# Altium PCB Bicimaps_3.PcbDoc
Units mil, origin at the board's own origin, x right, y up, seen from the top; angles counter-clockwise.
Board outline 2170 x 1455 mil, 2 copper layers (Top Layer, Bottom Layer); 43 components, 44 nets, 222 pads, 62 vias.
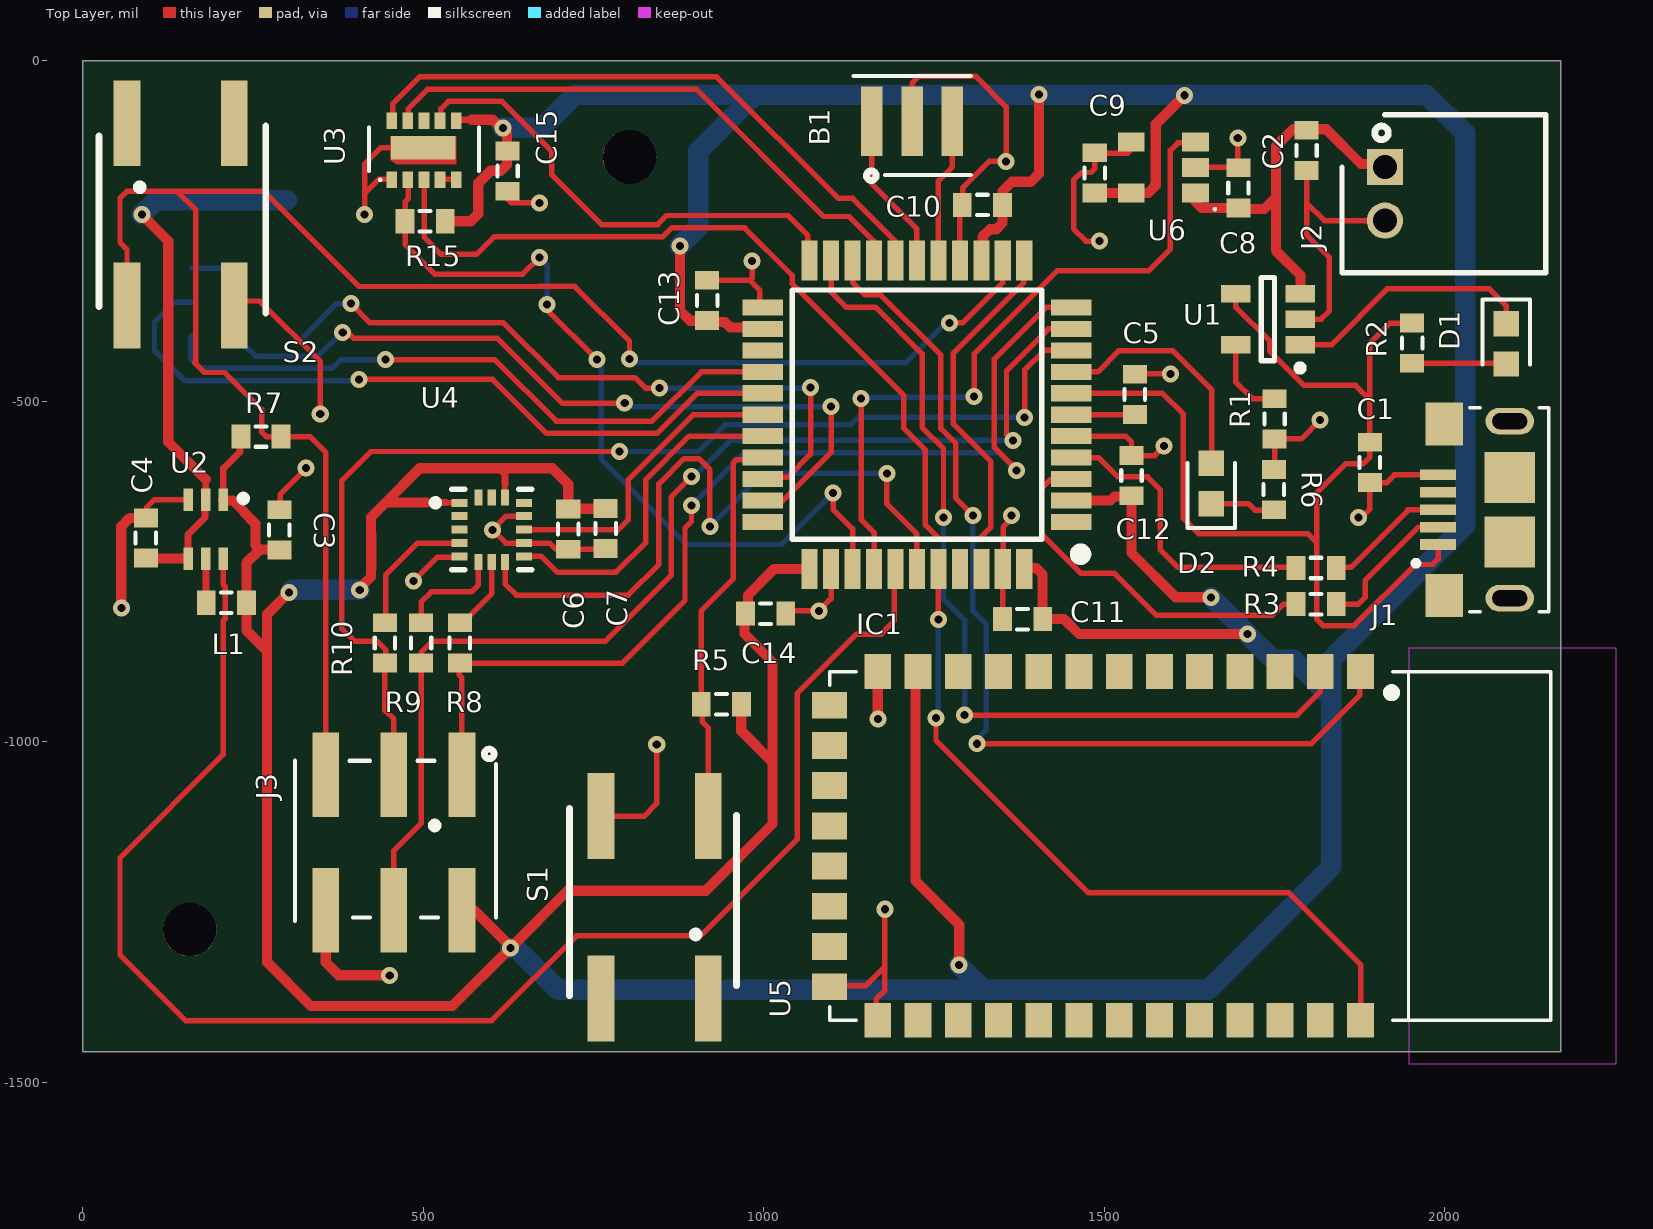
[diagram p0: Top Layer view]
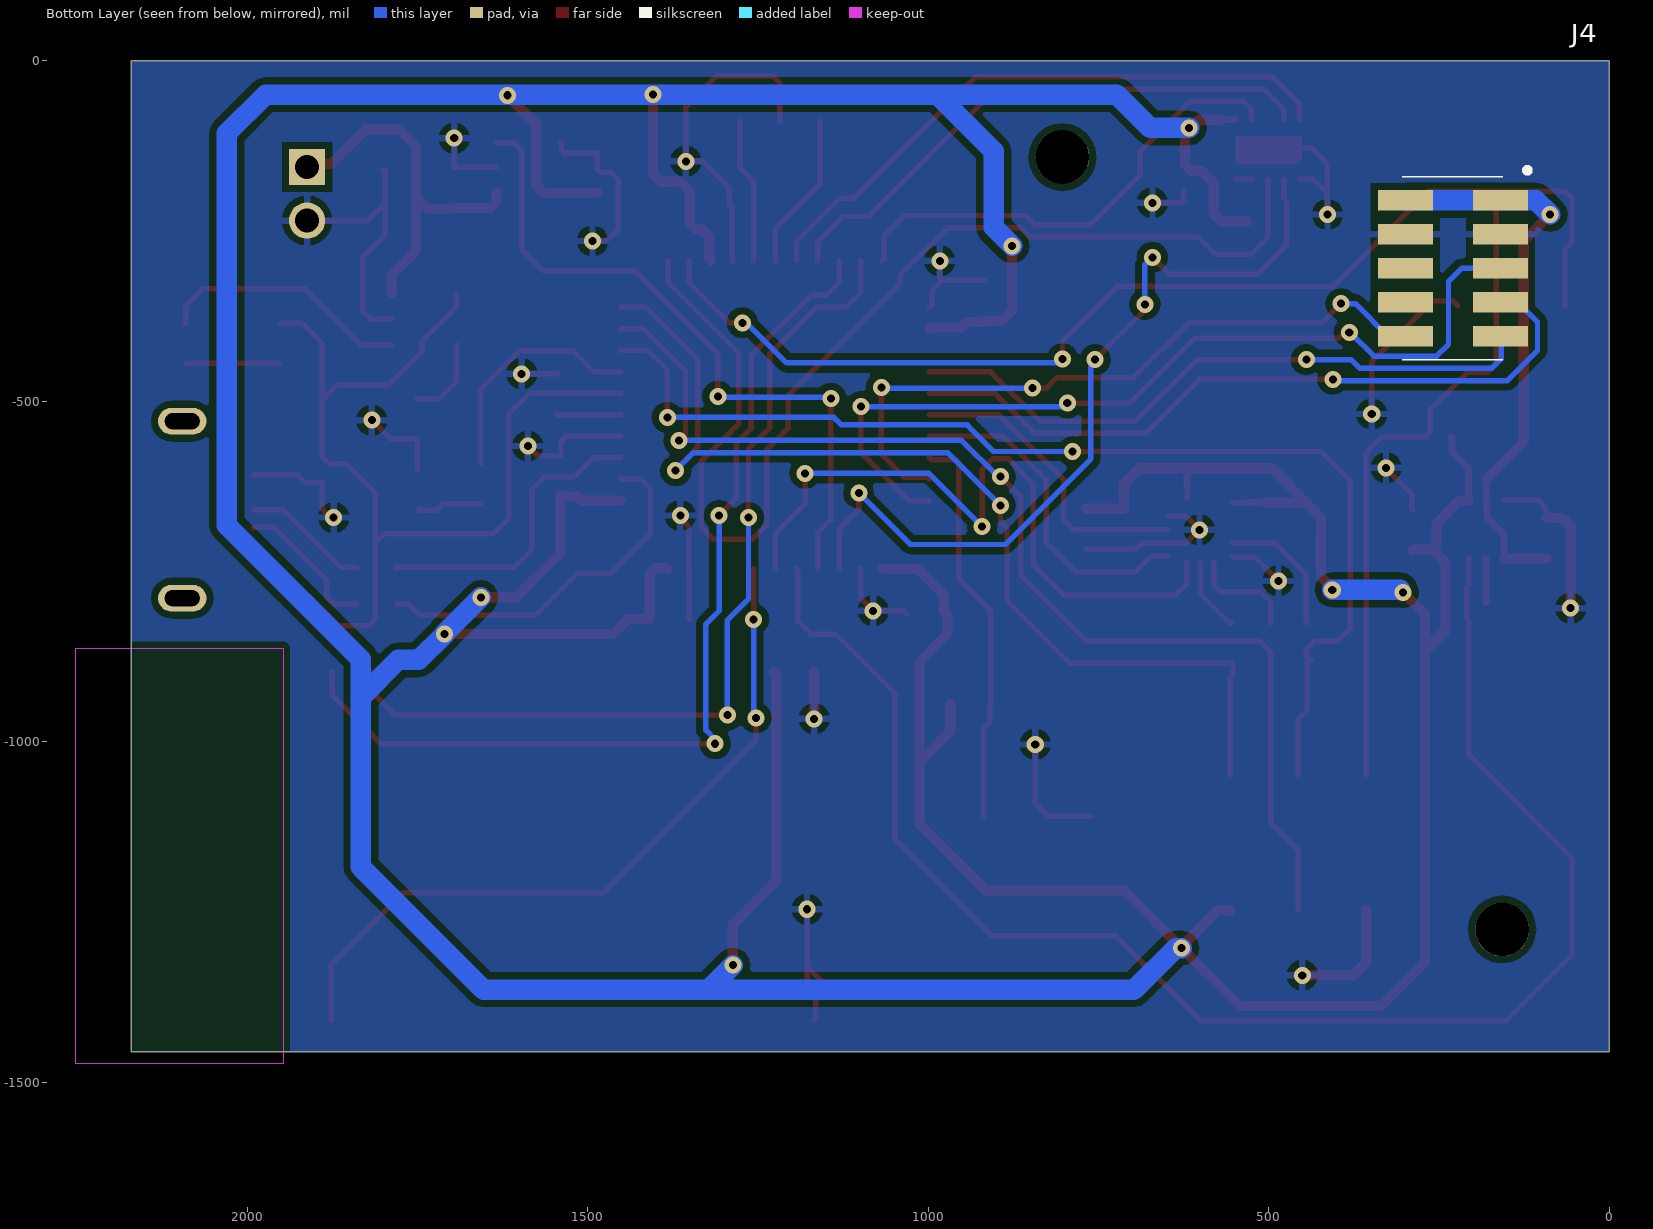
[diagram p1: Bottom Layer view, seen from below]

## Layer stack, top to bottom
Top Solder: solder mask 0.4, Solder Resist, Dk 3.5
Top Layer: signal copper 1.4
Dielectric 1: dielectric 12.6, FR-4, Dk 4.8
Bottom Layer: signal copper 1.4
Bottom Solder: solder mask 0.4, Solder Resist, Dk 3.5

## Board outline
0,-1455 2170,-1455 2170,0 0,0

## Design rules (kind name [scope] priority, off if disabled: settings)
Clearance [All] p1: gap=0 ignorepadtopadclearanceinfootprint=TRUE
MinimumSolderMaskSliver [All] p1: minsoldermaskwidth=1
PolygonConnect [All] p1: connectstyle=Relief reliefconductorwidth=10 reliefentries=4 polygonreliefangle="90 Angle" airgapwidth=10
RoutingVias [All] p1: holewidth=28 width=50 viastyle="Through Hole" minholewidth=28 minwidth=50 maxholewidth=28 maxwidth=50
ShortCircuit [All] p1: allowed=TRUE
SilkToSolderMaskClearance [IsPad] p1: minsilkscreentomaskgap=4 clearancetoexposedcopper=TRUE
SolderMaskExpansion [All] p1: expansion=4
Width [All] p1: maxlimit=30 minlimit=8 preferedwidth=10 toplayer_maxwidth=15 minimp=50.000000 maximp=50.000000 favimp=50.000000
27 further rules are at their usual default settings.

## Classes and differential pairs
component class Sensores_3: C6 C7 C15 J4 q R15 U3 U4 U5
component class Procesador_3: B1 C5 C10 C11 C12 C13 C14 D2 IC1 J3 R5 R6 R7 R8 R9 R10 S1 S2
component class Alimentacion_3: C1 C2 C3 C4 C8 C9 D1 J1 J2 L1 R1 R2 R3 R4 U1 U2 U6

## Components (designator, comment, footprint, x,y, rotation, side; value= is the part's Value field where it differs from the comment)
B1 "CSTCR6" CSTCR6M00G53 1218,-89 r180 top
C1 "Cap" 0603 1890,-590 r90 top value=4.7uF
C2 "Cap" 0603 1797,-132 r90 top value=4.7uF
C3 "Cap" 0603 289,-689 r270 top value=10uF
C4 "Cap" 0603 93,-701 r270 top value=10uF
C5 "Cap" 0603 1545,-490 r90 top value=1uF
C6 "Cap" 0603 713,-688 r90 top value=0.1uF
C7 "Cap" 0603 768,-687 r90 top value=10uF
C8 "Cap" 0603 1697,-187 r270 top value=1uF
C9 "Cap" 0603 1486,-165 r270 top value=1uF
C10 "Cap" 0603 1321,-212 r0 top value=0.1uF
C11 "Cap" 0603 1380,-820 r0 top value=0.1uF
C12 "Cap" 0603 1540,-609.53 r270 top value=0.1uF
C13 "Cap" 0603 917,-352 r270 top value=0.1uF
C14 "Cap" 0603 1003,-812 r180 top value=0.1uF
C15 "Cap" 0603 624,-162.53 r90 top value=1uF
D1 "150060GS75000" LEDC1608X80N 2090,-416 r270 top
D2 "150060GS75000" LEDC1608X80N 1657,-621 r90 top
IC1 "ATMEGA16U4-AU" "ATMEGA 16U4" 1225,-520 r180 top
J1 "10118193-0001LF" FCI_10118193-0001LF_10118193-0001LF(Primary) 2095.32,-659.41 r90 top
J2 "S2B-PH-K-S(LF)(SN)" S2B_Lipo_Header 1912,-156.26 r270 top
J3 "ISP_6pin" ISP_6PIN 457,-1148 r180 top
J4 "AMPHENOL SM-UART-04L" "PM SENSOR" 1.54,-0.28 r180 bottom
L1 "Inductor" 0603 211,-796 r0 top value=4.7uH
R1 "Res3" 0603 1750,-526 r90 top value=10K
R2 "Res3" 0603 1952,-415 r90 top value=1K
R3 "Res3" 0603 1811,-798 r0 top value=22
R4 "Res3" 0603 1811,-745 r0 top value=22
R5 "Res3" 0603 938,-945 r0 top value=10K
R6 "Res3" 0603 1749,-630 r270 top value=1K
R7 "Res3" 0603 262,-552 r180 top value=10K
R8 "Res3" 0603 554,-855 r90 top value=1K
R9 "Res3" 0603 497,-855 r90 top value=1K
R10 "Res3" 0603 444,-855 r270 top value=1K
R15 "Res3" 0603 503,-236 r0 top value=4.7K
S1 "EVQ-Q2P03W" EVQ-Q2P03W 840,-1243 r90 top value=Value
S2 "EVQ-Q2P03W" EVQ-Q2P03W 144,-226 r270 top value=Value
U1 "MCP73831T-2ACI/OT" SOT-23-OT5_N 1740.17,-379.57 r180 top
U2 "TPS61222" TPS61222DCK 181,-688 r0 top
U3 "CCS811" CCS811 454,-177 r90 top
U4 "LIS3DHTR" LIS3DHTR 529.89,-617.82 r0 top value=Value
U5 "MODULE-BLUETOOTH-HC-05(34P-27X13MM)" HC-05 1096.69,-1153.09 r270 top
U6 "NCP114" NCP114-TSOP5 1634,-119.6 r270 top

## Footprints (in the part's own frame and the unit in brackets; to place one, negate y for a bottom-side part, rotate by r counter-clockwise, add the part's x,y. Pads: shape width x height; smd on the part's side, far side on the other; paste and mask are expansions set on the pad)
0603 [mm]
  rect 0.7x0.9 smd: 1(-0.75,0) 2(0.75,0)
  silkscreen extent -0.2,-0.38 0.2,0.38, body extent -0.85,-0.48 0.85,0.48, height 0.9
"ATMEGA 16U4" [mm]
  rect 1.5x0.6 smd: 1(-5.75,4) 2(-5.75,3.2) 3(-5.75,2.4) 4(-5.75,1.6) 5(-5.75,0.8) 6(-5.75,0) 7(-5.75,-0.8) 8(-5.75,-1.6) 9(-5.75,-2.4) 10(-5.75,-3.2) 11(-5.75,-4) 23(5.75,-4) 24(5.75,-3.2) 25(5.75,-2.4) 26(5.75,-1.6) 27(5.75,-0.8) 28(5.75,0) 29(5.75,0.8) 30(5.75,1.6) 31(5.75,2.4) 32(5.75,3.2) 33(5.75,4)
  rect 0.6x1.5 smd: 12(-4,-5.75) 13(-3.2,-5.75) 14(-2.4,-5.75) 15(-1.6,-5.75) 16(-0.8,-5.75) 17(0,-5.75) 18(0.8,-5.75) 19(1.6,-5.75) 20(2.4,-5.75) 21(3.2,-5.75) 22(4,-5.75) 34(4,5.75) 35(3.2,5.75) 36(2.4,5.75) 37(1.6,5.75) 38(0.8,5.75) 39(0,5.75) 40(-0.8,5.75) 41(-1.6,5.75) 42(-2.4,5.75) 43(-3.2,5.75) 44(-4,5.75)
  silkscreen extent -6.3,-4.65 4.65,5.4, body extent -6,-6 6,6, height 1.2
CCS811 [mm] "CCS811 IAQ measurer"
  rect 0.6x0.4 smd mask+0.05: ADD(0.05,0) AUX(2.25,-1.2) INT(0.05,-1.2) PWM(0.05,-1.8) RES(0.05,-0.6) SCL(2.25,0) SDA(2.25,-0.6) SEN(0.05,-2.4) VDD(2.25,-2.4) WAK(2.25,-1.8)
  rect 0.88x2.413 smd paste+0 mask+0: GND(1.245,-1.168)
  Top Layer region: 0.8,0.05
  Top Layer region: 1.68,0.05 1.68,-2.4 0.62,-2.4 0.62,-0.17 0.8,0.05
  silkscreen extent 0.03,-3.25 2,0.85
CSTCR6M00G53 [mm]
  rect 0.8x2.6 smd: 1(1.5,0) 2(0,0) 3(-1.5,0)
  silkscreen extent -2.18,-1.68 2.18,2.21
EVQ-Q2P03W [mm]
  rect 3.2x1 smd: 1(-3.4,-2) 2(3.4,-2) 3(-3.4,2) 4(3.4,2)
  silkscreen extent -3.3,-3.05 3.68,3.18
FCI_10118193-0001LF_10118193-0001LF(Primary) [mm]
  rect 0.4x1.35 smd: 1(-1.3,2.675) 2(-0.65,2.675) 3(0,2.675) 4(0.65,2.675) 5(1.3,2.675)
  rect 1.6x1.4 smd: S1(-3.2,2.45) S2(3.2,2.45)
  rect 1.9x1.9 smd: S3(1.2,0) S4(-1.2,0)
  oval 1x1.8 hole 0.6 slot 1.3 at 90 deg: S5(-3.3,0) S6(3.3,0)
  silkscreen extent -3.8,-1.45 3.8,3.6
HC-05 [mm]
  rect 1.3x1 smd: 1(-6.5,19.8) 2(-6.5,18.3) 3(-6.5,16.8) 4(-6.5,15.3) 5(-6.5,13.8) 6(-6.5,12.3) 7(-6.5,10.8) 8(-6.5,9.3) 9(-6.5,7.8) 10(-6.5,6.3) 11(-6.5,4.8) 12(-6.5,3.3) 13(-6.5,1.8) 22(6.5,1.8) 23(6.5,3.3) 24(6.5,4.8) 25(6.5,6.3) 26(6.5,7.8) 27(6.5,9.3) 28(6.5,10.8) 29(6.5,12.3) 30(6.5,13.8) 31(6.5,15.3) 32(6.5,16.8) 33(6.5,18.3) 34(6.5,19.8)
  rect 1x1.3 smd: 14(-5.25,0) 15(-3.75,0) 16(-2.25,0) 17(-0.75,0) 18(0.75,0) 19(2.25,0) 20(3.75,0) 21(5.25,0)
  Top Layer region: 12.065,26.289
  Top Layer keep-out region: -8.636,29.083
  Keep-Out Layer region: -7.366,21.59 8.128,21.59 8.128,29.337 -7.366,29.337
  silkscreen extent -6.5,0 6.5,26.9
ISP_6PIN [mm]
  rect 1x3.15 smd: 1(-2.54,-2.525) 2(-2.54,2.525) 3(0,-2.525) 4(0,2.525) 5(2.54,-2.525) 6(2.54,2.525)
  silkscreen extent -3.81,-3.48 3.68,2.92
LEDC1608X80N [mm]
  rrect0% 0.95x0.95 smd: 1(-0.75,0) 2(0.75,0)
  silkscreen extent -1.65,-0.89 0.76,0.89
LIS3DHTR [mm]
  rect 0.6x0.3 smd: 1(0.6,-0.8) 2(0.6,-1.3) 3(0.6,-1.8) 4(0.6,-2.3) 5(0.6,-2.8) 9(3,-2.8) 10(3,-2.3) 11(3,-1.8) 12(3,-1.3) 13(3,-0.8)
  rect 0.3x0.6 smd: 6(1.3,-3) 7(1.8,-3) 8(2.3,-3) 14(2.3,-0.6) 15(1.8,-0.6) 16(1.3,-0.6)
  silkscreen extent -0.42,-3.3 3.3,-0.3
NCP114-TSOP5 [mm]
  rect 0.7x1 smd: 1(1.9,0) 2(0.95,0) 3(0,0) 4(0,-2.4) 5(1.9,-2.4)
  silkscreen extent 2.48,0.71 2.52,0.74
"PM SENSOR" [mm]
  rect 2.05x0.76 smd: 1(-4.025,-5.2) 2(-7.575,-5.2) 2(-7.575,-5.2) 3(-4.025,-6.47) 4(-7.575,-6.47) 5(-4.025,-7.74) 6(-7.575,-7.74) 7(-4.025,-9.01) 8(-7.575,-9.01) 9(-4.025,-10.28) 10(-7.575,-10.28)
  silkscreen extent -7.7,-11.15 -2.92,-3.99
S2B_Lipo_Header [mm]
  rect 1.35x1.35 / inner round 1.35 / far side rect 1.35x1.35 hole 0.9: 1(0,0)
  round 1.35 hole 0.9: 2(2,0)
  silkscreen extent -1.95,-1.6 3.95,6
SOT-23-OT5_N [mm] "SOT23, 5-Leads, Body 2.9x1.6mm, Pitch 0.95mm, Lead Span 2.7mm, IPC Medium Density"
  rect 1.1x0.65 smd: 1(-1.2,0.95) 2(-1.2,0) 3(-1.2,-0.95) 4(1.2,-0.95) 5(1.2,0.95)
  silkscreen extent -1.33,-1.55 0.25,1.95, body extent -0.9,-1.55 0.9,1.55, height 1.45
TPS61222DCK [mm]
  rect 0.35x0.85 smd: EN(0.65,-1.1) FB(0,1.1) GND(-0.65,1.1) L(0,-1.1) VIN(0.65,1.1) VOUT(-0.65,-1.1)
  silkscreen extent 1.27,1.02 1.52,1.27

## Part data
B1: library part CSTCE16M0V53C-R0, "SMD Ceramic Resonator 16 MHz 15PF CSTCE16M0V53C-R0, Ceramic Resonator, 16MHz Expander 15pF, 4-Pin, 3.2 x 1.3 x 0.9mm", Manufacturer_Name="Murata Electronics", Mouser Part Number=81-CSTCE16M0V53C-R0, Supplier Part Number 1=7926530, Datasheet Link=https://componentsearchengine.com/Datasheets/1/CSTCE16M0V53C-R0.pdf, Geometry.Height=1mm, Manufacturer_Part_Number=CSTCE16M0V53C-R0, Supplier 1=RSComponents, Supplier 2=Digi-Key, Supplier Part Number 2=490-1204-1-ND
C1 C2: library part Cap_0603, "Capacitor", Supplier Part Number 1=6911155, LatestRevisionDate=17-Jul-2002, LatestRevisionNote="Re-released for DXP Platform.", PackageDescription="Radial Cap, Thru-Hole; 2 Leads; 0.3 in Pin Spacing", PackageReference=RAD-0.3, Published=8-Jun-2000, Publisher="Altium Limited", Supplier 1=RSComponents, Supplier 2=Digi-Key, Supplier Part Number 2=399-5503-6-ND
C3 C4 C7: library part Cap_0603, "Capacitor", Supplier Part Number 1=7882893, LatestRevisionDate=17-Jul-2002, LatestRevisionNote="Re-released for DXP Platform.", PackageDescription="Radial Cap, Thru-Hole; 2 Leads; 0.3 in Pin Spacing", PackageReference=RAD-0.3, Published=8-Jun-2000, Publisher="Altium Limited", Supplier 1=RSComponents, Supplier 2=Digi-Key, Supplier Part Number 2=445-7486-1-ND
C5 C8 C9 C15: library part Cap_0603, "Capacitor", Supplier Part Number 1=4612708, LatestRevisionDate=17-Jul-2002, LatestRevisionNote="Re-released for DXP Platform.", PackageDescription="Radial Cap, Thru-Hole; 2 Leads; 0.3 in Pin Spacing", PackageReference=RAD-0.3, Published=8-Jun-2000, Publisher="Altium Limited", Supplier 1=RSComponents, Supplier 2=Digi-Key, Supplier Part Number 2=478-1251-1-ND
C6 C11 C12 C13 C14: library part Cap_0603, "Capacitor", Supplier Part Number 1=8015205, LatestRevisionDate=17-Jul-2002, LatestRevisionNote="Re-released for DXP Platform.", PackageDescription="Radial Cap, Thru-Hole; 2 Leads; 0.3 in Pin Spacing", PackageReference=RAD-0.3, Published=8-Jun-2000, Publisher="Altium Limited", Supplier 1=RSComponents, Supplier 2=Digi-Key, Supplier Part Number 2=399-1095-1-ND
C10: library part Cap_0603, "Capacitor", Supplier Part Number 1=147538, LatestRevisionDate=17-Jul-2002, LatestRevisionNote="Re-released for DXP Platform.", PackageDescription="Radial Cap, Thru-Hole; 2 Leads; 0.3 in Pin Spacing", PackageReference=RAD-0.3, Published=8-Jun-2000, Publisher="Altium Limited", Supplier 1=RSComponents, Supplier 2=Digi-Key, Supplier Part Number 2=399-1281-1-ND
D1 D2: "Wurth Elektronik WL-SMCW 520 nm Green LED, 1608 (0603) Clear SMD package", Manufacturer_Name="Wurth Elektronik", RS Part Number=8154209P, Supplier Part Number 1=6973715, Arrow Part Number=150060GS75000, Arrow Price/Stock=http://uk.rs-online.com/web/p/products/8154209P, Datasheet Link=https://componentsearchengine.com/Datasheets/2/150060GS75000.pdf, Geometry.Height=0.8mm, Manufacturer_Part_Number=150060GS75000, RS Price/Stock=http://uk.rs-online.com/web/p/products/8154209P, Supplier 1=RSComponents, Supplier 2=Digi-Key, Supplier Part Number 2=732-4971-1-ND
IC1: "Integrated Circuit", Manufacturer_Name=Microchip, Supplier Part Number 1=1773649, Datasheet Link=http://www.atmel.com/images/atmel-7766-8-bit-avr-atmega16u4-32u4_summary.pdf, Height=1.2mm, Manufacturer_Part_Number=ATMEGA16U4-AU, Supplier 1=RSComponents, Supplier 2=Digi-Key, Supplier Part Number 2=ATMEGA16U4-AU-ND
J1: "Single Port 5 Contact Shielded SMT MICRO USB B-Type Receptacle", Package=None, Supplier Part Number 1=8632989, Availability=Unavailable, MF="Amphenol FCI", MP=10118193-0001LF, Price=None, SnapEDA_Link=https://www.snapeda.com/parts/10118193-0001LF/Amphenol%20FCI/view-part/?ref=snap, Supplier 1=RSComponents, Supplier 2=Digi-Key, Supplier Part Number 2=609-4616-1-ND
J2: "PH-2.0mm Header side entry 2 way JST PH Series, Series Number S2B, 2mm Pitch 2 Way 1 Row Right Angle PCB Header, Through Hole Termination, 2A", Manufacturer_Name="JST (JAPAN SOLDERLESS TERMINALS)", RS Part Number=1724889, Supplier Part Number 1=8201494, Arrow Part Number=S2B-PH-K-S(LF)(SN), Arrow Price/Stock=https://www.arrow.com/en/products/s2b-ph-k-s-lf-sn/jst-manufacturing, Datasheet Link=http://uk.rs-online.com/web/p/products/8201494, Geometry.Height=6mm, Manufacturer_Part_Number=S2B-PH-K-S(LF)(SN), RS Price/Stock=http://uk.rs-online.com/web/p/products/1724889, Supplier 1=RSComponents, Supplier 2=Digi-Key, Supplier Part Number 2=455-1719-ND
J3: Supplier Part Number 1=571-5-146130-2, Supplier 1=Mouser, Supplier 2=Digi-Key, Supplier Part Number 2=5-146130-2-ND
J4: library part AMPHENOL, Supplier Part Number 1=527-SM-UART-04L, Supplier 1=Mouser, Supplier 2=Digi-Key, Supplier 3=RSComponents, Supplier 4=Digi-Key, Supplier Part Number 2=235-1590-ND, Supplier Part Number 3=7679066, Supplier Part Number 4=SAM9874-ND
L1: Supplier Part Number 1=7754697, Code_IEC=1005, Code_JEITA=0402, LatestRevisionDate=29-May-2009, LatestRevisionNote="IPC-7351 Footprint Added.", PackageDescription="Chip Inductor", PackageReference=0402-A, Published=8-Jun-2000, Publisher="Altium Limited", Supplier 1=RSComponents, Supplier 2=Digi-Key, Supplier Part Number 2=445-3607-1-ND
R1 R5 R7: "Resistor", Supplier Part Number 1=1251173, LatestRevisionDate=29-May-2009, LatestRevisionNote="IPC-7351 Footprint Added.", PackageDescription="Chip Resistor", PackageReference=J1-0603, Published=8-Jun-2000, Publisher="Altium Limited", Supplier 1=RSComponents, Supplier 2=Digi-Key, Supplier Part Number 2=P10.0KHDKR-ND
R2 R6 R8 R9 R10: "Resistor", Supplier Part Number 1=8145889, LatestRevisionDate=29-May-2009, LatestRevisionNote="IPC-7351 Footprint Added.", PackageDescription="Chip Resistor", PackageReference=J1-0603, Published=8-Jun-2000, Publisher="Altium Limited", Supplier 1=RSComponents, Supplier 2=Digi-Key, Supplier Part Number 2=P1.00KHCT-ND
R3 R4: "Resistor", Supplier Part Number 1=7408928, LatestRevisionDate=29-May-2009, LatestRevisionNote="IPC-7351 Footprint Added.", PackageDescription="Chip Resistor", PackageReference=J1-0603, Published=8-Jun-2000, Publisher="Altium Limited", Supplier 1=RSComponents, Supplier 2=Digi-Key, Supplier Part Number 2=P22GCT-ND
R15: "Resistor", Supplier Part Number 1=8206865, LatestRevisionDate=29-May-2009, LatestRevisionNote="IPC-7351 Footprint Added.", PackageDescription="Chip Resistor", PackageReference=J1-0603, Published=8-Jun-2000, Publisher="Altium Limited", Supplier 1=RSComponents, Supplier 2=Digi-Key, Supplier Part Number 2=P4.70KHCT-ND
S1 S2: "Tactile 3.1 heigth", Manufacturer_Part_Number=EVQP2602W, Supplier Part Number 1=7561858, Built_By=EMA_UL_Team, C="Copyright (C) 2015 Accelerated Designs. All rights reserved", RefDes=RefDes, Supplier 1=RSComponents, Supplier 2=Digi-Key, Supplier Part Number 2=P12949SCT-ND, Type=DEV, Vendor=Panasonic
U1: "Miniature Single-Cell, Fully Integrated Li-Ion, Li-Polymer Charge Management Controller, 4.2V, 5-Pin SOT-23, Industrial Temperature, Tape and Reel", Supplier Part Number 1=7386360, Code_IPC=SOT23-5, ComponentLink1Description=Datasheet, ComponentLink1URL=http://ww1.microchip.com/downloads/en/DeviceDoc/21984e.pdf, ComponentLink2Description="Packaging Specification", ComponentLink2URL=http://www.microchip.com/stellent/groups/techpub_sg/documents/packagingspec/en012702.pdf, ComponentLink3Description="Microchip.com Home", ComponentLink3URL=http://www.microchip.com/, DatasheetVersion="revE, Sep-2008", LatestRevisionDate=27-Nov-2009, LatestRevisionNote="Updated to datasheet revision E, Sep-2008", PackageDescription="5-Lead Plastic Small Outline Transistor (OT) [SOT-23]", PackageReference=SOT-23-OT5, PackageVersion="revBB, Aug-2009", Published=29-Jan-2009, Publisher="Altium Limited", Supplier 1=RSComponents, Supplier 2=Digi-Key, Supplier Part Number 2=MCP73831T-2ATI/OTCT-ND
U2: Supplier Part Number 1=8123647, Supplier 1=RSComponents, Supplier 2=Digi-Key, Supplier Part Number 2=296-24172-1-ND
U3: Supplier Part Number 1=985-CCS811B-JOPR5K, Supplier 1=Mouser, Supplier 2=Digi-Key, Supplier Part Number 2=CCS811B-JOPR5KCT-ND
U4: "Imported", Supplier Part Number 1=7931364, Built_By=EMA_UL_Team, C="Copyright (C) 2015 Accelerated Designs. All rights reserved", Manufacturer_Part_Number=LIS3DHTR, RefDes=RefDes, Supplier 1=RSComponents, Supplier 2=Digi-Key, Supplier Part Number 2=497-10613-6-ND, Type=DEV, Vendor=STMicroelectronics
U5: library part "HC-05 (Bluetooth module)", "Modulo bluetooth, 34 pin", Package=None, Availability=Unavailable, MF="Texas Instruments", MP=HC05, Price=None, SnapEDA_Link=https://www.snapeda.com/parts/HC05/Texas%20Instruments/view-part/?ref=snap
U6: Supplier Part Number 1=1263178, Supplier 1=RSComponents, Supplier 2=Digi-Key, Supplier Part Number 2=NCP114ASN330T1GOSCT-ND

## Free pads (board coordinates)
  round 78.8 hole 78.8 mask+2: 1(803.15,-141.73) 2(157.48,-1275.59)

## Via types
v1: diameter 25, hole 11.81, Top Layer to Bottom Layer, 62 vias

## Nets (pads, with @x,y where several pads share a name; then routed paths per layer and width w, separated by ;. In a path a pad name is that pad's centre, name@x,y a point inside that pad or via, vN(x,y) a via of type N, cw(c..) or ccw(c..) an arc to the next point about the centre after c; other vN are vias at no path point)
CS_AC: IC1.39 U4.8 | length 1033.4
  Top Layer w8: U4.8 620.44,-768.44 637,-785 801,-785 846,-740 846,-621.52 883.02,-584.5 904.98,-584.5 921,-600.52 v1(921,-684) ; v1(1181,-606) 1181,-650.93 1225,-694.93 IC1.39
  Bottom Layer w8: v1(921,-684) 999,-606 v1(1181,-606)
D+: IC1.4 R4.1 | length 448.9
  Top Layer w8: IC1.4 1491.7,-582.99 1519.98,-611.28 1563.52,-611.28 1582,-629.76 1582,-718 1608,-744 1734.94,-744 1780.47,-744 R4.1
D-: IC1.3 R3.1 | length 544.9
  Top Layer w8: IC1.3 1421.74,-614.49 1407.85,-628.37 1407.85,-695.09 1465.76,-753 1515,-753 1576.5,-814.5 1746.5,-814.5 1763,-798 R3.1@1780.47,-798
GND: B1.2 C1.1 C2.1 C3.1 C4.1 C5.2 C6.1 C7.1 C8.1 C9.1 C10.1 C11.1 C12.1 C13.1 C14.1 C15.1 IC1.5 IC1.15 IC1.23 IC1.35 IC1.43 J1.5 J2.2 J3.6 J4.3 J4.4 R1.1 R6.1 S1.4 S2.4 U1.2 U2.GND U3.ADD U4.5 U4.10 U4.12 U5.13 U5.21 U5.22 U6.2 U6.4 | length 4011.3
  Top Layer w8: C4.1 94,-656 105.31,-644.69 U2.GND ; S2.4 229.6,-353 260,-353 349,-442 v1(349,-519) ; C3.1 290,-658.47 290,-637 328,-599 v1(328,-598) ; v1(414,-226) 414,-195.25 ; U3.ADD@454.51,-174.61 434.64,-174.61 414,-195.25 ; v1(486,-764) 521,-729 552.57,-729 U4.5 ; 500,-128 438.21,-128 414,-152.21 414,-195.25 ; C15.1 625,-193.06 625,-204.31 629.69,-209 v1(671,-209) ; U4.12 622,-669 v1(602,-689) 621.37,-708.37 U4.10 685.37,-708.37 694,-717 712.47,-717 C6.1 767,-717.53 C7.1 ; S1.4 824.86,-1109.14 843,-1091 v1(843,-1004) ; C13.1 979.47,-322.47 ; v1(983,-294) 983,-318.95 979.47,-322.47 ; IC1.23 994,-357.9 994,-337 979.47,-322.47 ; C14.1 1036.53,-808 v1(1081,-808) 1099.02,-789.98 IC1.35 ; U5.21 1098.48,-1358 1150,-1358 1178,-1330 ; U5.22 1165,-1406.44 1165,-1378 1178,-1365 1178,-1330 ; v1(1178,-1246) 1178,-1330 ; B1.2 1218,-33 1228,-23 1311,-23 1356,-68 v1(1356,-148) 1331,-148 1292,-187 1292,-211.47 C10.1 1288,-215.47 IC1.15@1288,-295 ; IC1.15@1287,-296 IC1.15@1287.99,-295.01 ; IC1.15 IC1.15@1287.99,-295.01 ; C11.1 1350.98,-819.49 IC1.43 1351.5,-745.86 1351.5,-685.1 1364,-672.6 v1(1364,-668) ; IC1.5 1531.5,-551.5 1540,-560 C12.1 1574,-580 v1(1588,-566) ; v1(1493,-265) 1473,-265 1455,-247 1455,-175.65 1466.24,-164.41 1480.59,-164.41 1486,-159 C9.1 1486.53,-136 1534.31,-136 1539,-131.31 1539,-120.11 U6.4 ; C5.2 1545.47,-460 v1(1597,-460) ; U6.2 C8.1@1696.53,-157 ; v1(1696,-114) 1696,-156.47 C8.1@1696.53,-157 ; C8.1 C8.1@1696.53,-157 ; R6.1 1750,-599.47 R1.1 1789.47,-555.53 v1(1817,-528) ; U1.2 1818.43,-379.57 1830.43,-367.57 1830.43,-289.54 1797,-256.11 1797,-208.82 ; C2.1@1800.94,-161.53 C2.1 1797,-208.82 ; v1(1873,-671) 1877.31,-671 1890,-658.31 C1.1 1890.47,-620 1914,-620 1925.77,-608.23 J1.5 J1.5@1988.23,-610 ; J2.2 1823.18,-235 1797,-208.82
  Top Layer w15: v1(57,-804) 57,-684 69.53,-671.47 C4.1 ; J3.6 357,-1324 376,-1343 v1(451,-1343) ; v1(1167.56,-966.44) U5.13
INT0_AC: IC1.28 U4.11 | length 455.8
  Top Layer w8: U4.11 784.54,-688.68 785.61,-689.75 801,-674.35 801,-615.61 896.61,-520 IC1.28
INT1_AC: IC1.29 U4.9 | length 496.9
  Top Layer w8: U4.9 673.65,-728.06 696.59,-751 783.41,-751 827,-707.41 827,-615.07 890.57,-551.5 IC1.29
"INT GAS": IC1.12 U3.INT | length 1697.6
  Top Layer w8: U3.INT@501.76,-174.61 501.76,-259.76 526.46,-284.46 578.46,-284.46 604.09,-258.83 851.65,-258.83 864.98,-245.5 971.98,-245.5 1041.71,-315.23 1041.71,-327.53 1205.5,-491.33 1205.5,-539.5 1237.5,-571.5 1237.5,-681.98 1258.02,-702.5 1315.98,-702.5 1333.5,-684.98 1333.5,-588.43 1278,-532.93 1278,-430 1382,-326 1382,-294.1 IC1.12
MASTER_BT: IC1.40 U5.34 | length 1094.4
  Top Layer w8: v1(1253,-965) 1253,-998 1477,-1222 1771,-1222 1876.22,-1327.22 U5.34 ; v1(1256.5,-820.5) IC1.40
  Bottom Layer w8: v1(1253,-965) 1256.5,-961.5 v1(1256.5,-820.5)
MISO_AC: R8.2 U4.7 | length 111.4
  Top Layer w8: R8.2 557.94,-825.47 601,-782.41 600.76,-782.17 U4.7
MISO_ISP: IC1.11 J3.1 R8.1 | length 1519.6
  Top Layer w8: J3.1 557,-906 553,-902 553,-885.53 R8.1 792.47,-884.53 884.5,-792.5 884.5,-686.5 894,-677 v1(894,-653) ; v1(1371,-602) 1371,-600.48 1338.5,-567.98 1338.5,-438.5 1414.48,-362.52 IC1.11
  Bottom Layer w8: v1(894,-653) 971.5,-575.5 1344.5,-575.5 v1(1371,-602)
MOSI_AC: R9.2 U4.6 | length 159.1
  Top Layer w8: R9.2 497,-795 512,-780 571,-780 581.32,-769.68 581.07,-769.44 U4.6
MOSI_ISP: IC1.10 J3.4 R9.1 | length 1687.4
  Top Layer w8: J3.4 457,-1160 497,-1120 R9.1 497,-869 513.73,-852.27 767.73,-852.27 864,-756 864,-641 v1(894,-611) ; v1(1366,-558) 1356.5,-548.5 1356.5,-455.5 1417.98,-394.02 IC1.10
  Bottom Layer w8: v1(894,-611) 898,-611 951.5,-557.5 1365.5,-557.5 v1(1366,-558)
NetC5_1: C5.1 IC1.6 | length 93.8
  Top Layer w8: IC1.6 1544.53,-520 C5.1
NetD1_1: D1.1 U1.1 | length 373.4
  Top Layer w8: U1.1 1834.03,-416.97 1916,-335 2065,-335 2090,-360 D1.1
NetD1_2: D1.2 R2.1 | length 138.4
  Top Layer w8: R2.1 2089,-444.53 D1.2
NetD2_1: D2.1 R6.2 | length 98.9
  Top Layer w8: D2.1 1711.53,-650.53 1721,-660 1748.53,-660 R6.2 R6.2@1747,-657.53
NetD2_2: D2.2 IC1.8 | length 351.4
  Top Layer w8: IC1.8 1490.52,-457.01 1521.26,-426.26 1600.74,-426.26 1658,-483.52 1658,-590.47 D2.2
NetJ1_2: J1.2 R3.2 | length 211.7
  Top Layer w8: R3.2@1839.53,-798 1873,-798 1883,-788 1883,-763.34 1961.34,-685 J1.2
NetJ1_3: J1.3 R4.2 | length 187.5
  Top Layer w8: R4.2@1838.53,-745 1839.53,-744 1862,-744 1945.59,-660.41 1945.59,-659.41 J1.3
NetL1_1: L1.1 U2.L | length 64.9
  Top Layer w10: U2.L 181.24,-731.54 181.24,-795.76 L1.1
NetR1_2: R1.2 U1.5 | length 122.2
  Top Layer w8: U1.5 1693,-417.04 1693,-472 1717.47,-496.47 R1.2
NetU3_PWM: U3.PWM U3.SEN | length 23.6
  Top Layer w8: U3.PWM@525.38,-174.61 U3.SEN@549,-174.61
ON_3.3V/5V: IC1.38 U2.EN | length 2269
  Top Layer w8: U2.EN 206.59,-769.82 209.25,-772.48 209.25,-819.52 206.59,-822.18 206.59,-1019 55,-1170.59 55,-1313 151.5,-1409.5 600.5,-1409.5 725,-1285 907.36,-1285 1049,-1143.36 1049,-929.02 1136.02,-842 1172.31,-842 1192,-822.31 1192,-747.88 IC1.38
POWER_BT: IC1.37 U6.3 | length 1026.4
  Top Layer w8: v1(1143,-496) 1143,-674 1162.01,-693.01 IC1.37 ; v1(1309,-493) 1309,-431 1431.52,-308.48 1565.52,-308.48 1597.2,-276.8 1597.2,-131.8 1608,-121 1632.6,-121 U6.3
  Bottom Layer w8: v1(1143,-496) 1144.5,-494.5 1307.5,-494.5 v1(1309,-493)
"RESET GAS": IC1.36 R15.1 U3.RES | length 1203.7
  Top Layer w8: U3.RES@478.13,-174.61 478.13,-202.87 474,-207 474,-235.47 R15.1 473.47,-270.19 517,-313.72 646.28,-313.72 v1(671,-289) ; v1(682,-358) 682,-366 v1(755,-439) ; v1(1102,-635) 1102,-659 1130.51,-687.51 IC1.36
  Bottom Layer w8: v1(671,-289) 682,-300 v1(682,-358) ; v1(755,-439) 761.5,-445.5 761.5,-584.98 887.02,-710.5 1026.5,-710.5 v1(1102,-635)
RESET_N: IC1.13 J3.5 R7.1 S2.2 | length 2665.9
  Top Layer w8: S2.2 65.26,-277.26 55,-267 55,-202 65,-192 139,-192 ; J3.5 357,-575 334,-552 R7.1 270,-552 263,-545 263,-512.23 208.77,-458 179,-458 165,-444 166,-443 166,-219 139,-192 ; v1(803,-438) 803,-412 722.5,-331.5 671.02,-331.5 670.81,-331.72 406.19,-331.72 266.48,-192 139,-192 ; v1(1273,-385) 1292,-385 1351,-326 IC1.13
  Bottom Layer w8: v1(803,-438) 809,-444 1208,-444 1267,-385 v1(1273,-385)
RESET_SENSOR_2: IC1.32 J4.5 | length 1301.9
  Top Layer w8: v1(382,-399) 389.48,-399 398.48,-408 609,-408 704,-503 v1(796,-503) ; IC1.32 1028.26,-645.98 1099,-575.25 v1(1099,-508)
  Bottom Layer w8: J4.5 217,-305 236.31,-324.31 236.31,-416.66 253.61,-433.96 345.92,-433.96 v1@380.88,-399 ; v1(796,-503) 801,-508 v1(1099,-508)
RX_BT: IC1.21 U5.2 | length 1339.7
  Top Layer w8: IC1.21 1099.02,-340.02 1121,-362 1164,-362 1232.58,-430.58 1232.58,-538.42 1264,-569.84 v1(1264,-671) ; v1(1295,-961) 1783,-961 1817,-927 1817,-897.35 U5.2
  Bottom Layer w8: v1(1264,-671) 1264,-790.52 1295,-821.52 v1(1295,-961)
RX_HMP: IC1.27 J4.7 | length 1077.6
  Top Layer w8: v1(406,-468) 602,-468 681.5,-547.5 843.43,-547.5 902.43,-488.5 IC1.27
  Bottom Layer w8: J4.7 134.61,-355 105.65,-383.96 105.65,-425.76 149.85,-469.96 404.04,-469.96 v1(406,-468)
SCL_GAS: IC1.18 U3.SCL | length 905.9
  Top Layer w8: U3.SCL@455.71,-86.8 455.71,-63.06 494.77,-24 931,-24 1109.5,-202.5 1130.61,-202.5 1193.5,-265.39 IC1.18
SCLK_AC: R10.1 U4.4 | length 198.7
  Top Layer w8: R10.1 445,-824.47 445,-755 491.63,-708.37 U4.4
SCLK_ISP: IC1.9 J3.3 R10.2 | length 1681.1
  Top Layer w8: J3.3 457,-967 444,-954 R10.2 438.05,-878.58 441.17,-878.58 445,-874.75 445,-865 432.25,-852.25 399.25,-852.25 380.5,-833.5 380.5,-617.02 423.52,-574 v1(788,-574) ; v1(1383,-524) 1383,-454.46 1411.94,-425.51 IC1.9
  Bottom Layer w8: v1(788,-574) 904,-574 943,-535 1127.5,-535 1138.5,-524 v1(1383,-524)
SDA_GAS: IC1.19 U3.SDA | length 834.2
  Top Layer w8: U3.SDA@478,-87.87 478,-71 506,-43 506,-42 901,-42 1088,-229 1125.61,-229 1162,-265.39 IC1.19
SET_SENSOR_2: IC1.31 J4.10 | length 999
  Top Layer w8: v1(394,-357) 422,-385 618,-385 698.5,-465.5 810.98,-465.5 826.48,-481 v1(847,-481) ; IC1.31 1001.11,-612 1035,-612 1069,-578 v1(1069,-480)
  Bottom Layer w8: J4.10@325.16,-405 373.16,-357 v1(394,-357) ; v1(847,-481) 1068,-481 v1(1069,-480)
TX_BT: IC1.20 U5.1 | length 1436
  Top Layer w8: IC1.20 1130.51,-325.51 1149,-344 1171.46,-344 1260,-432.54 1260,-540.39 1282,-562.39 1282,-643 v1(1307,-668) ; v1(1313,-1003) 1804,-1003 1875,-932 1875,-898.41 U5.1
  Bottom Layer w8: v1(1307,-668) 1307,-808.07 1326.5,-827.57 1326.5,-982.98 1313,-996.48 v1(1313,-1003)
TX_HMP: IC1.26 J4.9 | length 951.7
  Top Layer w8: v1(445,-439) 605,-439 695.5,-529.5 835.98,-529.5 908.47,-457.01 IC1.26
  Bottom Layer w8: J4.9 159,-406 159,-438 172.96,-451.96 366.52,-451.96 379.48,-439 v1(445,-439)
VBUS: C1.2 IC1.7 J1.1 R2.2 U1.4 | length 1592.5
  Top Layer w8: IC1.7 1585.5,-488.5 1616,-519 1616,-672 1639,-695 1799,-695 1811.75,-707.75 ; U1.4 1693,-342.24 1693,-362 1743.1,-412.1 1743.1,-426.9 1793.2,-477 1869,-477 1888,-496 1890,-496 ; R2.2 1951.47,-386 1919,-386 1890,-415 1890,-496 ; J1.1 1990,-732 1982.1,-739.9 1956.56,-739.9 1866.74,-829.72 1821.36,-829.72 1811.75,-820.1 1811.75,-707.75 ; 1811.75,-707.75 1811.75,-635 1855,-591.75 1880.25,-591.75 1890,-582 C1.2 1890,-496
VCC_3.3V: C3.2 C6.2 C7.2 C9.2 C10.2 C11.2 C12.2 C13.2 C14.2 C15.2 IC1.2 IC1.14 IC1.24 IC1.34 IC1.44 J3.2 L1.2 R5.2 R7.2 R15.2 U2.VIN U3.VDD U4.1 U4.14 U5.12 U6.5 | length 9991.2
  Top Layer w8: 534,-649 553.2,-649 U4.1 ; 620,-623 620,-641 U4.14
  Top Layer w10: U2.VIN 206.59,-598.41 207.59,-598.41 231,-575 231,-553.47 R7.2 ; 505,-649 534,-649 ; U3.VDD@550,-87 571,-87 ; 611,-598.68 620,-607.68 620,-623
  Top Layer w15: U2.VIN 206.59,-645.39 207.2,-646 221,-646 237,-662 237,-663 253.78,-679.78 253.78,-711.78 260,-718 ; C3.2 288.47,-718 260,-718 ; v1(303,-781) 271,-813 271,-867 ; v1(407,-777) 407,-774.29 423.5,-757.79 423.5,-746.09 424,-745.59 424,-695.53 423.47,-695 423.47,-670.37 444.92,-648.92 ; 505,-649 445,-649 444.92,-648.92 ; R15.2 570,-236 581,-225 581,-180.22 599.45,-161.78 614.21,-161.78 623,-152.99 623,-136 622,-135 C15.2 623,-132 v1@623,-107.71 ; J3.2 557.59,-1248 575.71,-1248 628,-1300.29 v1(628,-1303) ; 571,-87 602.29,-87 614.29,-99 v1(617,-99) ; C15.2@624,-132 C15.2@625,-133 ; C7.2 767.5,-657.97 713.5,-657.97 C6.2 713,-622 689.68,-598.68 611,-598.68 495.16,-598.68 444.92,-648.92 ; v1(877,-272) 877,-367 892,-382 916.53,-382 C13.2 919.47,-384 943,-384 950.83,-391.83 996.44,-391.83 IC1.24 ; R5.2 967,-945.53 967,-984 1013,-1030 ; IC1.34 1015.62,-746.38 977,-785 977,-808.47 C14.2 972,-813.47 972,-842 1013,-883 1013,-1030 ; U5.12 1223,-900.8 1223,-1204.5 1287,-1268.5 v1(1287,-1328) ; IC1.14 1321.75,-291.36 1321.75,-258.18 1332.34,-247.59 1341.41,-247.59 1350.53,-238.47 C10.2 1350.53,-192 1364.53,-178 1392.43,-178 1404,-166.43 v1(1404,-50) ; IC1.44 1383.86,-745 1400,-745 1409.53,-754.53 C11.2 1441,-820 1463,-842 v1(1710,-842) ; IC1.2 1509.02,-645.98 1515,-640 1539.06,-640 C12.2 1540,-723 1605,-788 v1(1657,-788) ; C9.2 1486.06,-194.46 1539.45,-194.46 U6.5 1564.6,-194.4 1575.7,-183.3 1575.7,-93.3 v1(1618,-51) ; 260,-718 240.53,-737.47 L1.2 240.53,-836.53 271,-867 ; 271,-867 271,-1324 335,-1388 543,-1388 v1(628,-1303) ; v1(628,-1303) 712,-1219 914.89,-1219 1013,-1120.89 1013,-1030
  Bottom Layer w30: v1@307,-777 v1(407,-777) ; v1(617,-99) 674,-99 723,-50 v1(1404,-50) 1973,-50 2030,-107 2030,-682 1833,-879 1833,-927 1829,-931 ; v1(628,-1303) 637,-1303 698,-1364 1323,-1364 ; v1(877,-272) 904,-245 904,-133.13 982,-55.13 ; v1(1287,-1328) 1323,-1364 ; v1(1657,-788) 1710,-841 v1(1710,-842) 1748,-880 1778,-880 1829,-931 ; 1323,-1364 1653,-1364 1833,-1184 1833,-931 1829,-931
VCC_3.7V: C2.2 C8.2 J2.1 U1.3 U6.1 | length 568.4
  Top Layer w15: U6.1@1633.6,-194 U6.1 1634,-207.74 1642.79,-216.53 C8.2 1698.47,-218 1735,-218 1750.5,-202.5 1752,-202.5 ; U1.3 1788,-341.59 1788,-315 1752,-279 1752,-202.5 ; J2.1 1907.74,-152 1877,-152 1826,-101 1798.47,-101 C2.2 1795.53,-101 1777,-101 1752,-126 1752,-202.5
VCC_5V: C4.2 J4.1 J4.2 U2.FB U2.VOUT | length 838.8
  Top Layer w10: U2.VOUT 155.02,-730.92 155,-696 180,-671 180,-645.69 U2.FB 181,-615
  Top Layer w15: v1(87,-226) 126,-265 126,-560 181,-615 ; C4.2 93.39,-730.92 U2.VOUT@155.02,-730.92
  Bottom Layer w30: v1(87,-226) 107.96,-205.04 J4.1 J4.1 J4.2@299.76,-205
"WAKE GAS": IC1.22 U3.WAK | length 710.3
  Top Layer w8: U3.WAK@526,-87.38 526,-71 537,-60 615.48,-60 688.96,-133.49 688.96,-167.69 762.1,-240.83 844.2,-240.83 857.52,-227.5 1035.5,-227.5 1065,-257 1065,-291.1 IC1.22
WAKEUP: IC1.30 R5.1 S1.2 | length 590.9
  Top Layer w8: S1.2@920.26,-1107.62 S1.2 918.74,-979.74 910,-971 910,-946.53 R5.1 908.47,-807.53 955,-761 955,-590.69 959.69,-586 995.61,-586 IC1.30
XTAL1: B1.1 IC1.17 | length 232
  Top Layer w8: B1.1 1158.94,-180.94 1225,-247 IC1.17
XTAL2: B1.3 IC1.16 | length 213.1
  Top Layer w8: IC1.16 1256.5,-176.61 1277.06,-156.06 B1.3
pads on no net: IC1.1 IC1.25 IC1.33 IC1.41 IC1.42 J1.4 J1.S1 J1.S2 J1.S3 J1.S4 J1.S5 J1.S6 J4.6 J4.8 S1.1 S1.3 S2.1 S2.3 U3.AUX U3.GND U4.2 U4.3 U4.13 U4.15 U4.16 U5.3 U5.4 U5.5 U5.6 U5.7 U5.8 U5.9 U5.10 U5.11 U5.14 U5.15 U5.16 U5.17 U5.18 U5.19 U5.20 U5.23 U5.24 U5.25 U5.26 U5.27 U5.28 U5.29 U5.30 U5.31 U5.32 U5.33

## Polygon pours and split planes (outlines as drawn)
GND on Bottom Layer "Bottom Layer-GND" (solid, pour order 10): 0,0 2170,0 2170,-1455 0,-1455

## Silkscreen, mask and mechanical layers (free items; w line width, h text height)
Mechanical 9 (Mech9):
  the board outline again, w1